# Altium PCB PCB04.PcbDoc
Units mm, origin at the board's own origin, x right, y up, seen from the top; angles counter-clockwise.
Board outline 100 x 100 mm, 2 copper layers (Top Layer, Bottom Layer), stack 1.67 mm thick; 6 components, 2 nets, 6 pads, 14 vias.
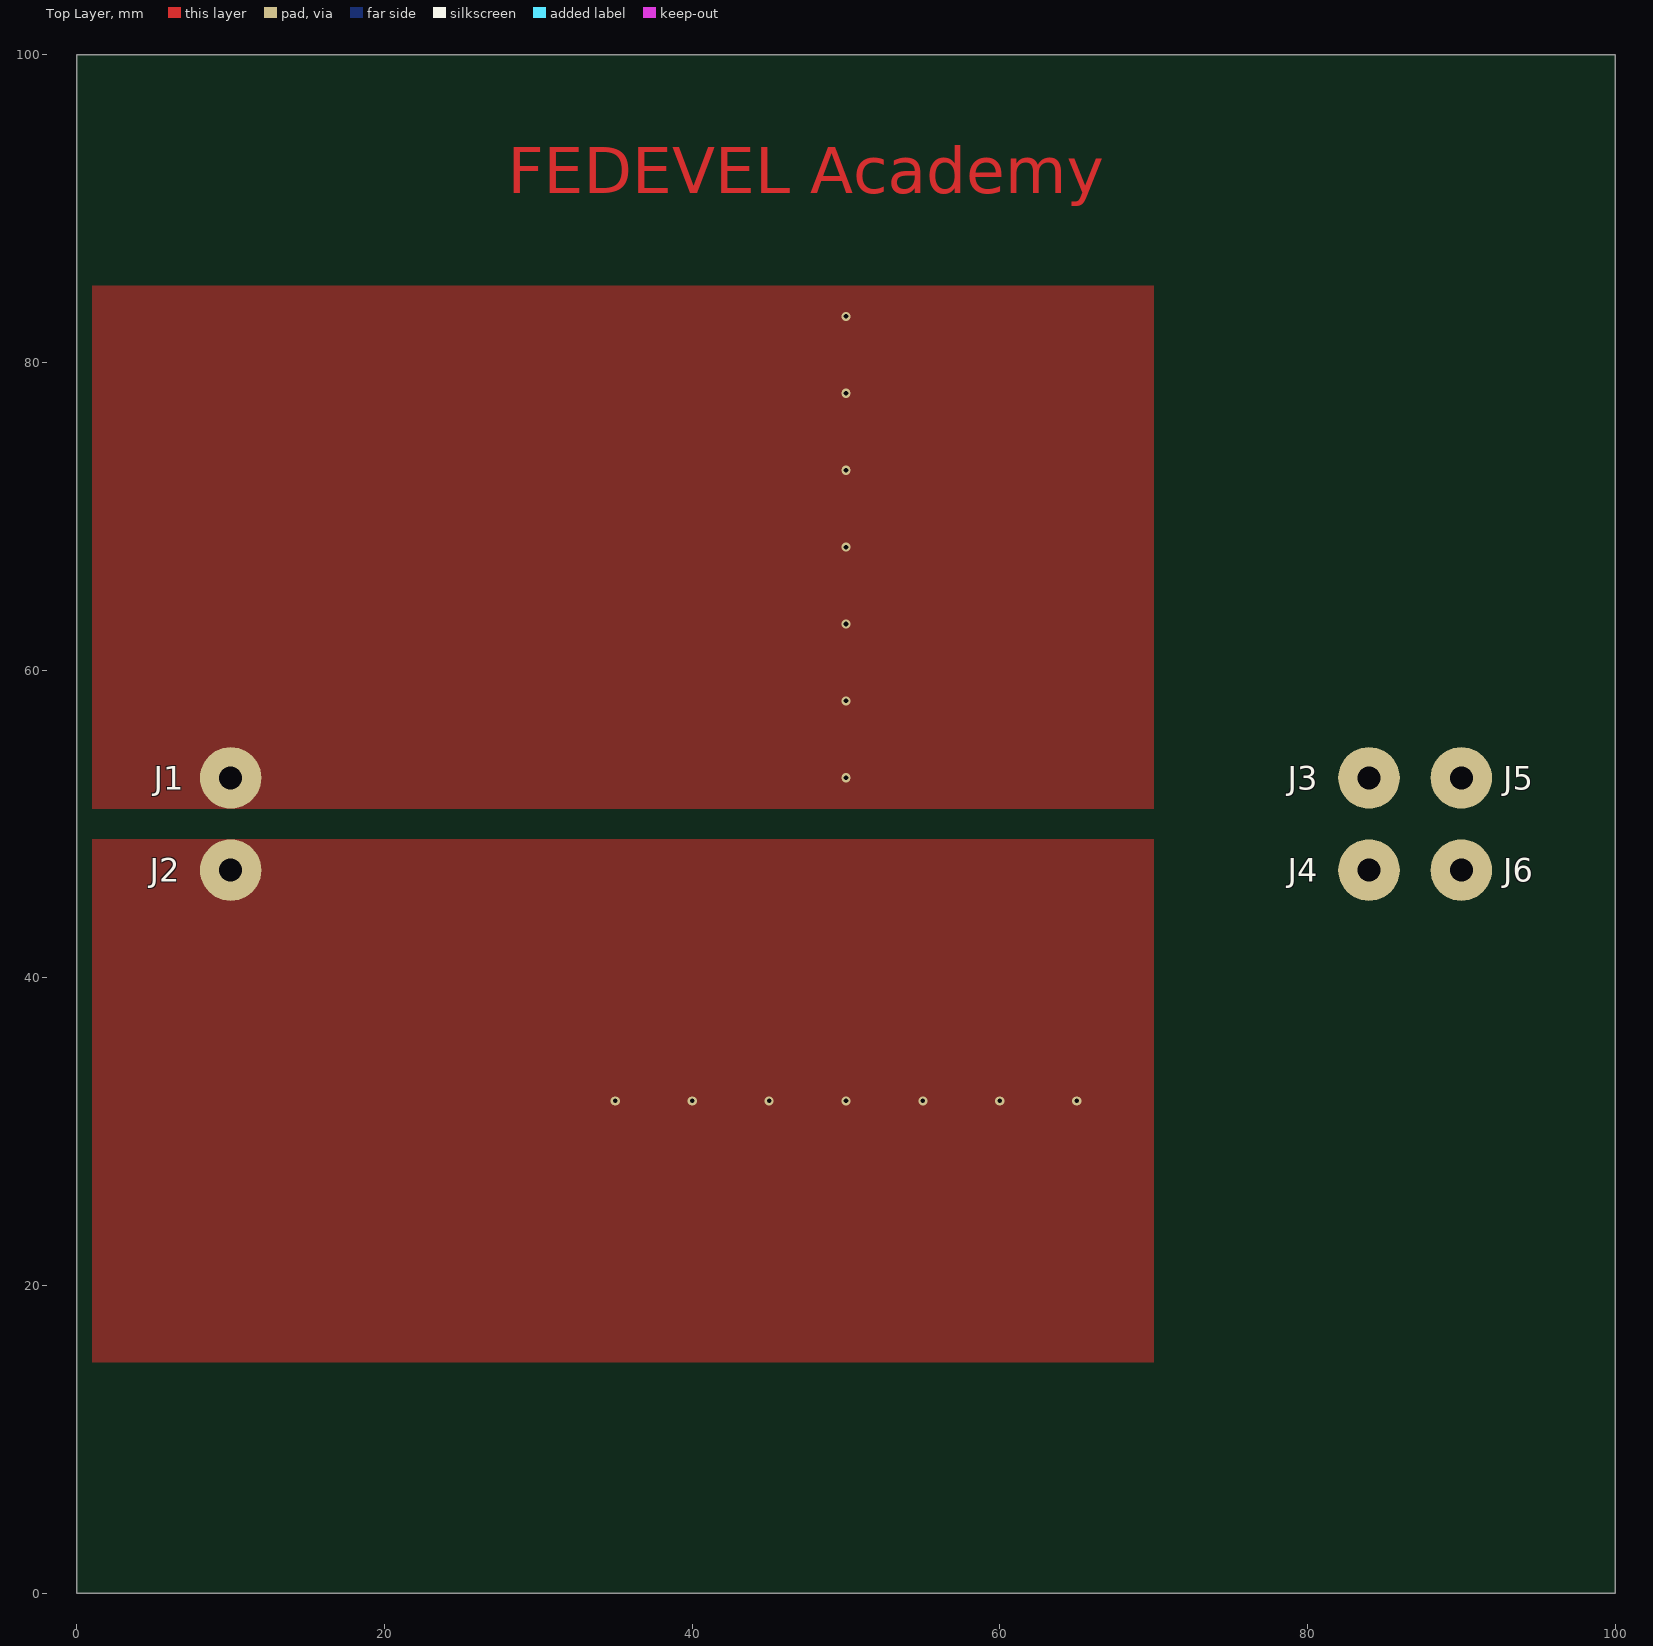
[diagram p0: Top Layer view]
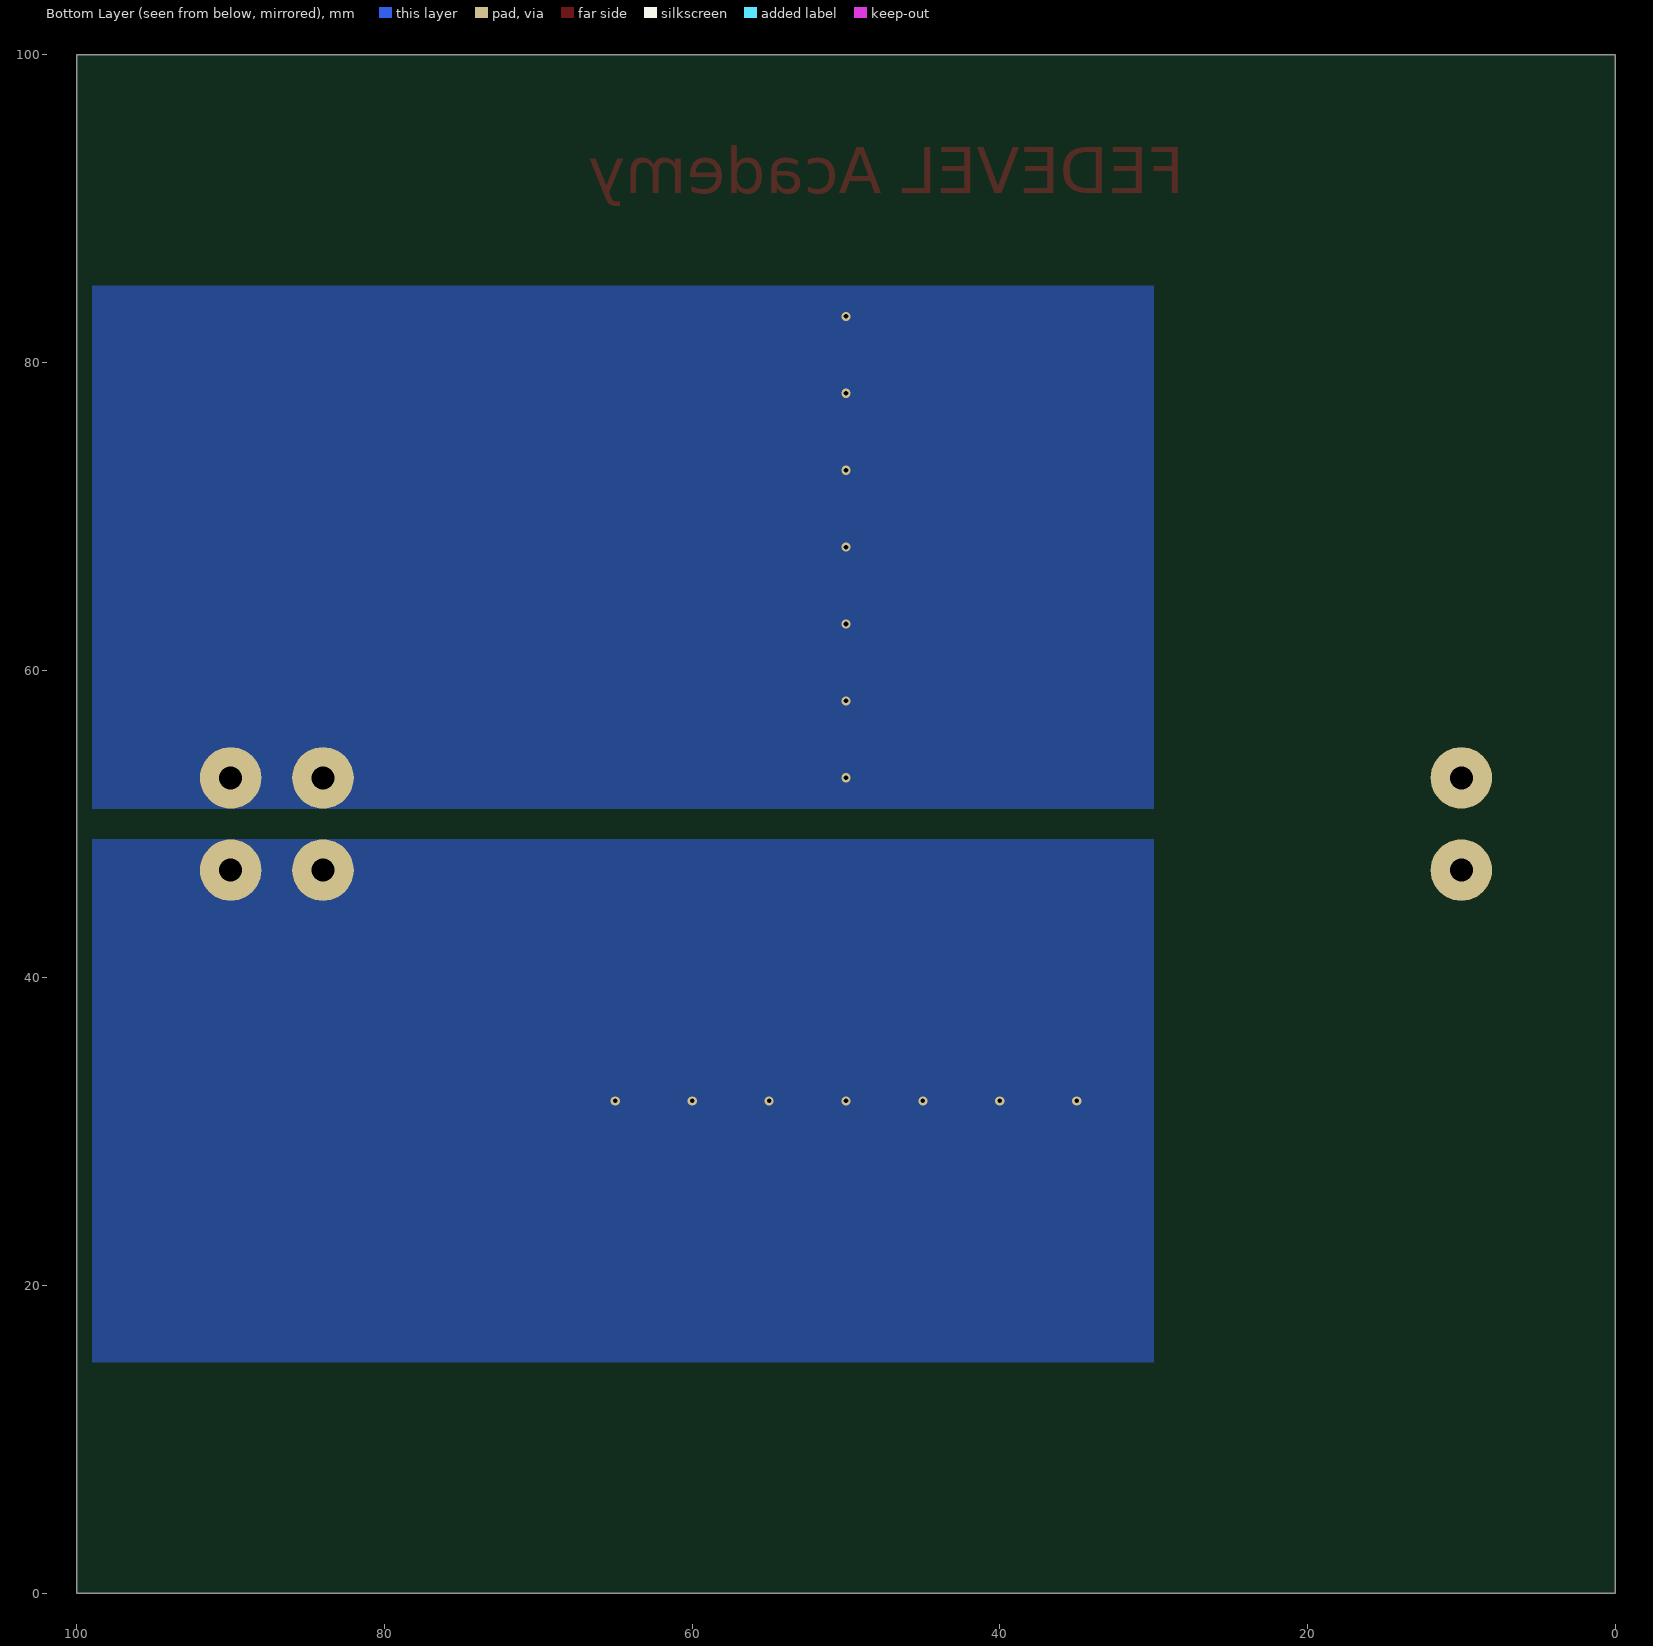
[diagram p1: Bottom Layer view, seen from below]

## Layer stack, top to bottom
Top Solder: solder mask 0.0254, SM-001, Dk 4
Top Layer: signal copper 0.035
Dielectric 1: core 1.6, Core-043, Dk 4.5
Bottom Layer: signal copper 0.035
Bottom Solder: solder mask 0.0254, SM-001, Dk 4

## Board outline
0,0 100,0 100,100 0,100

## Design rules (kind name [scope] priority, off if disabled: settings)
Clearance [All] p1: gap=0.3 ignorepadtopadclearanceinfootprint=FALSE
PlaneConnect [All] p1: planeconnectstyle=Direct reliefexpansion=0.508 reliefentries=4 reliefconductorwidth=0.254 reliefairgap=0.254
PolygonConnect [All] p1: connectstyle=Direct reliefconductorwidth=0.254 reliefentries=4 polygonreliefangle="90 Angle" airgapwidth=0.254
RoutingVias [All] p1: holewidth=0.3 width=0.6 viastyle="Through Hole" minholewidth=0.3 minwidth=0.6 maxholewidth=0.3 maxwidth=0.6
SolderMaskExpansion [All] p1: expansion=0.102 istentingtop=FALSE
Width [All] p1: maxlimit=0.254 minlimit=0.15 preferedwidth=0.15
29 further rules are at their usual default settings.

## Components (designator, comment, footprint, x,y, rotation, side; value= is the part's Value field where it differs from the comment)
J1 "4MMx1.5MM" PAD_WITH_HOLE_4MMx1MM5 10,53 r0 top
J2 "4MMx1.5MM" PAD_WITH_HOLE_4MMx1MM5 10,47 r0 top
J3 "4MMx1.5MM" PAD_WITH_HOLE_4MMx1MM5 84,53 r0 top
J4 "4MMx1.5MM" PAD_WITH_HOLE_4MMx1MM5 84,47 r0 top
J5 "4MMx1.5MM" PAD_WITH_HOLE_4MMx1MM5 90,53 r0 top
J6 "4MMx1.5MM" PAD_WITH_HOLE_4MMx1MM5 90,47 r0 top

## Footprints (in the part's own frame and the unit in brackets; to place one, negate y for a bottom-side part, rotate by r counter-clockwise, add the part's x,y. Pads: shape width x height; smd on the part's side, far side on the other; paste and mask are expansions set on the pad)
PAD_WITH_HOLE_4MMx1MM5 [mm]
  round 4 hole 1.5: 1(0,0)

## Part data
J1 J2 J3 J4 J5 J6: library part PAD_WITH_HOLE_4MMx1MM5, "Pad with a hole 4mm x 1.5mm"

## Via types
v1: diameter 0.6, hole 0.3, Top Layer to Bottom Layer, tented both sides, 14 vias

## Nets (pads, with @x,y where several pads share a name; then routed paths per layer and width w, separated by ;. In a path a pad name is that pad's centre, name@x,y a point inside that pad or via, vN(x,y) a via of type N, cw(c..) or ccw(c..) an arc to the next point about the centre after c; other vN are vias at no path point)
+VCC: J1.1 J3.1 J5.1
  other v1: 50,53 50,58 50,63 50,68 50,73 50,78 50,83
GND: J2.1 J4.1 J6.1
  other v1: 35,32 40,32 45,32 50,32 55,32 60,32 65,32

## Polygon pours and split planes (outlines as drawn)
+VCC on Bottom Layer "+VCC_L02_P005" (solid, pour order 5): 30,51 99,51 99,85 30,85
GND on Bottom Layer "GND_L02_P003" (solid, pour order 3): 30,49 99,49 99,15 30,15
GND on Top Layer "GND_L01_P006" (solid, pour order 6): 1,49 70,49 70,15 1,15
+VCC on Top Layer "+VCC_L01_P001" (solid, pour order 1): 1,51 70,51 70,85 1,85

## Other copper
Top Layer:
  text "FEDEVEL Academy" at 28.007,91 h3

## Silkscreen, mask and mechanical layers (free items; w line width, h text height)
Top Solder:
  rectangle: 26,89 74,96
Board:
  the board outline again, w0.6